# Altium PCB PCB_V1.PcbDoc
Units mil, origin at the board's own origin, x right, y up, seen from the top; angles counter-clockwise.
Board outline 4094.49 x 4094.49 mil, 2 copper layers (Top Layer, Bottom Layer); 16 components, 33 nets, 100 pads, 2 vias.
Unrouted connection lines stored in the file: 1.
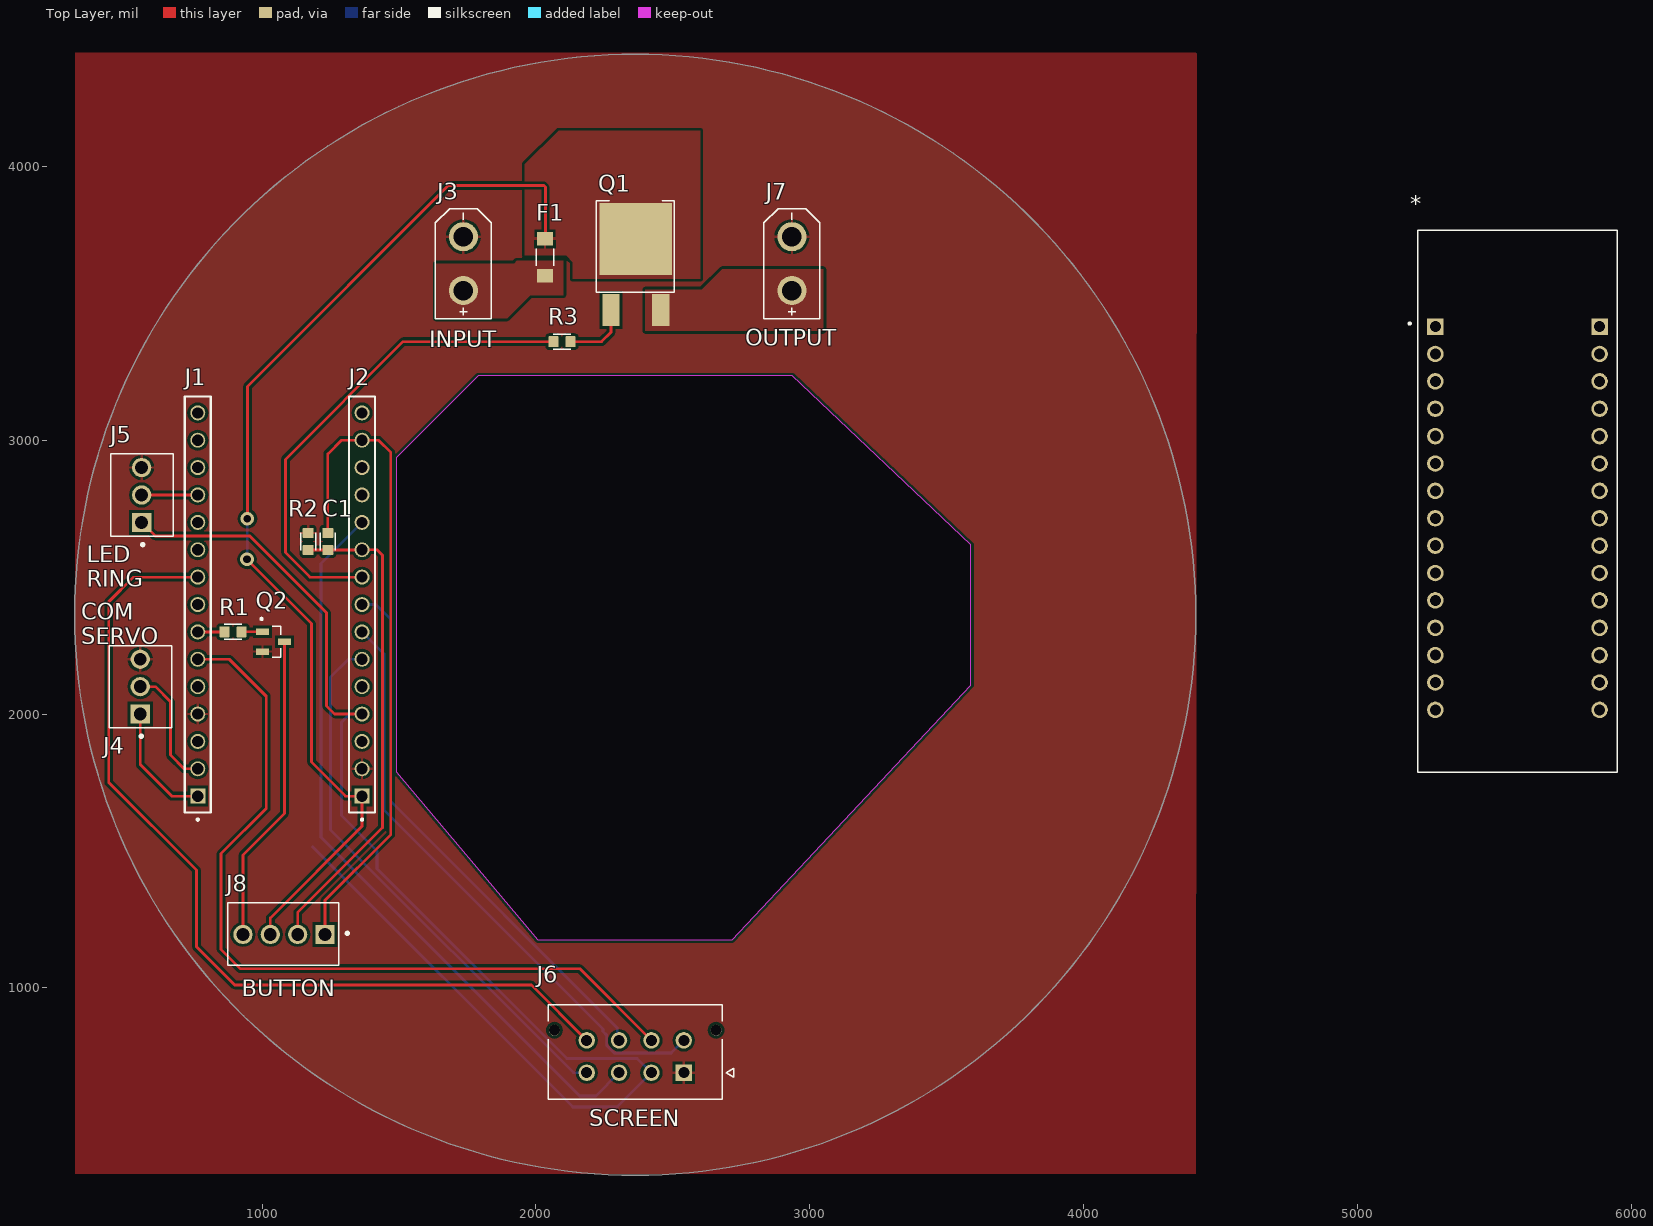
[diagram p0: Top Layer view]
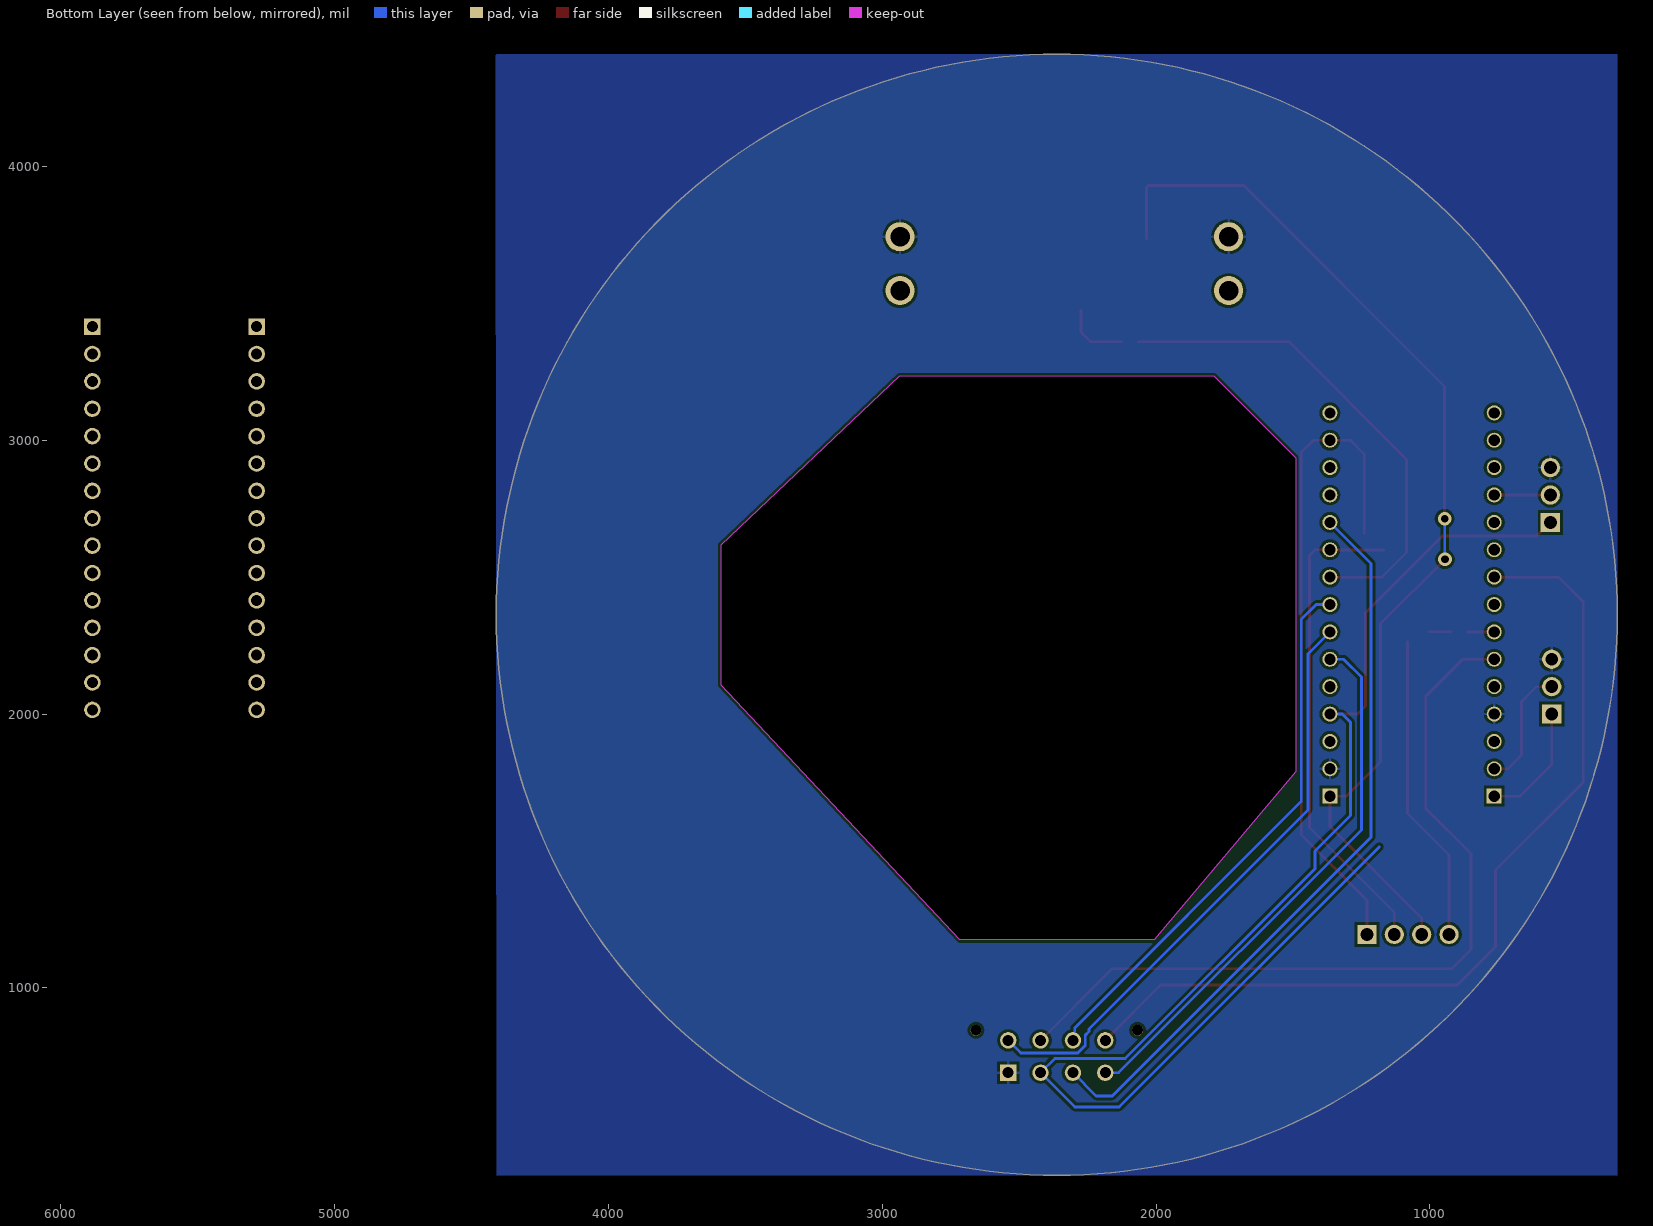
[diagram p1: Bottom Layer view, seen from below]
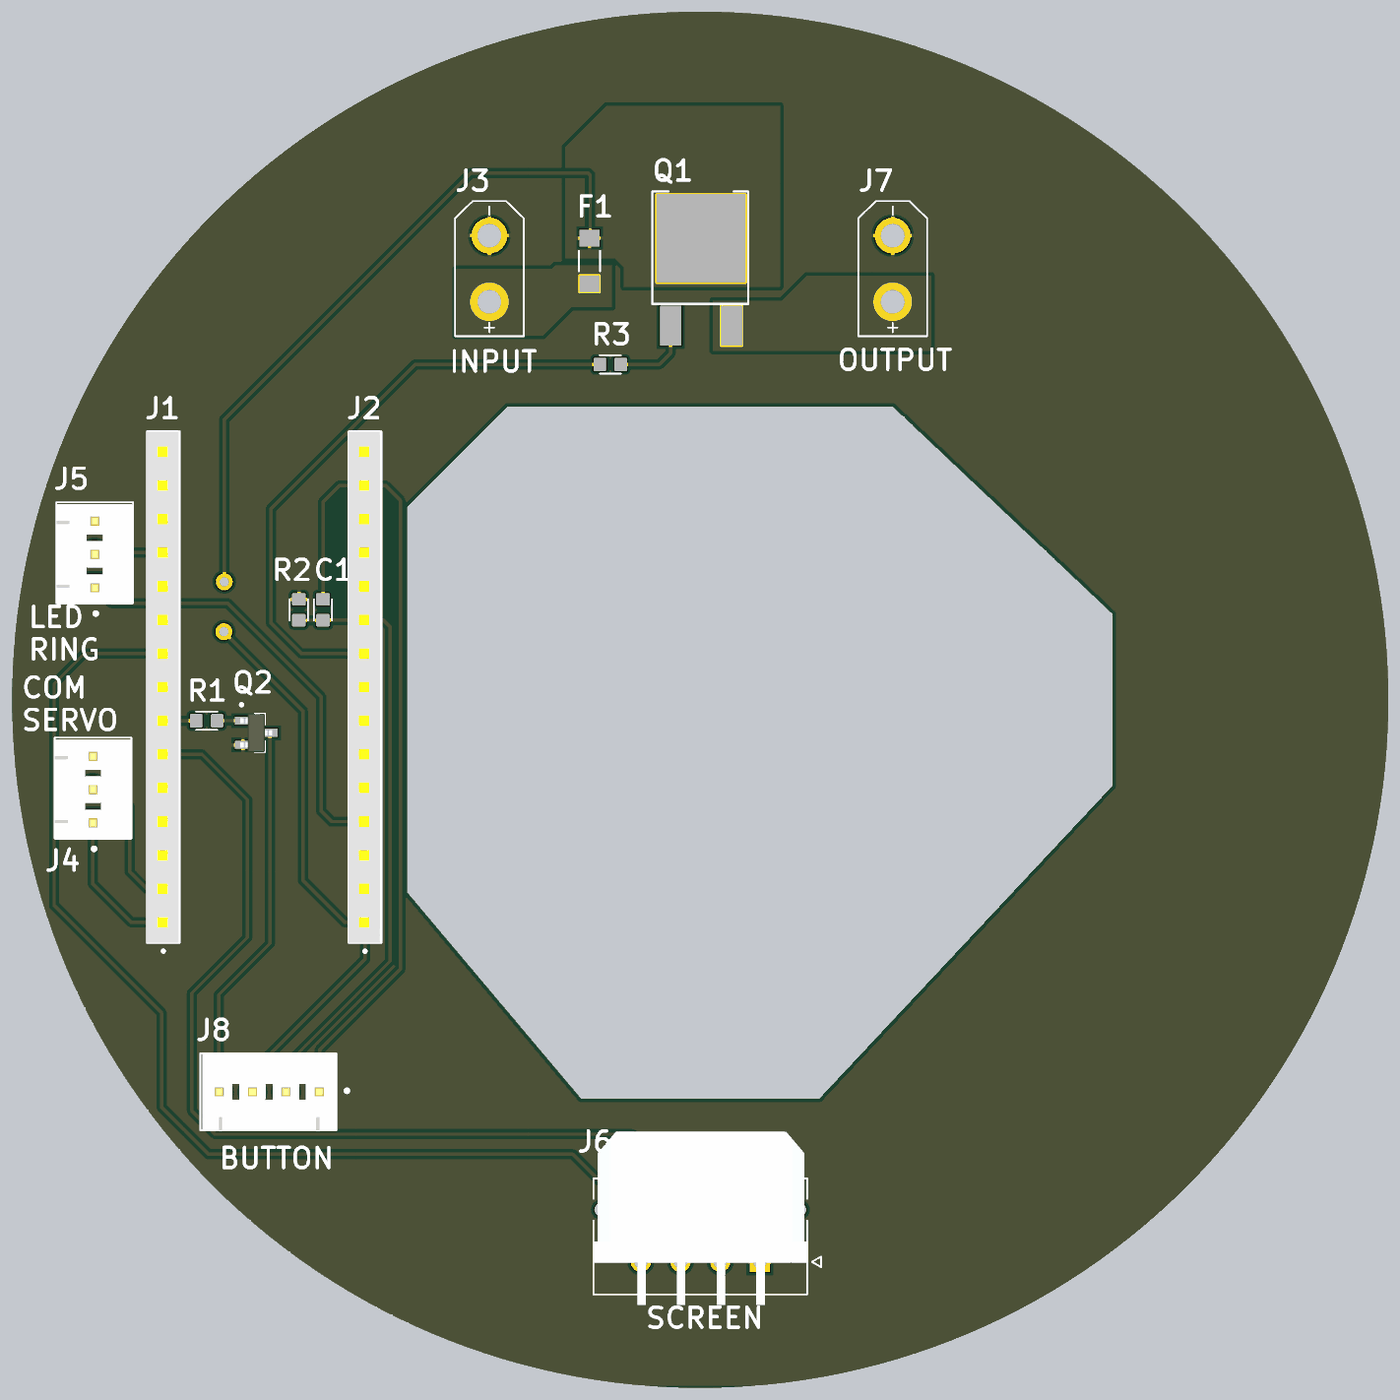
[diagram p2: 3D render of the assembled board from above, using the file's embedded part models]

## Layer stack, top to bottom
Top Solder: solder mask 0.4, Solder Resist, Dk 3.5
Top Layer: signal copper 1.4
Dielectric 1: dielectric 12.6, FR-4, Dk 4.8
Bottom Layer: signal copper 1.4
Bottom Solder: solder mask 0.4, Solder Resist, Dk 3.5

## Board outline
2362.45,315.21 cw(c2362.45,2362.45) 315.21,2362.45 cw(c2362.45,2362.45) 2362.45,4409.7 cw(c2362.45,2362.45) 4409.7,2362.45 cw(c2362.45,2362.45)
cut-out: 1490.14,1789.06 2007.59,1175.18 2716.79,1175.18 3589.1,2106.02 3589.1,2618.36 2935.77,3234.69 1789.06,3234.77 1490.22,2936.04

## Design rules (kind name [scope] priority, off if disabled: settings)
Clearance [All] p1: gap=10 ignorepadtopadclearanceinfootprint=FALSE except(0: Arc-Hole Track-Hole SMDPad-Hole THPad-Hole Via-Hole Fill-Hole Poly-Hole Region-Hole Text-Hole)
PolygonConnect [All] p1: connectstyle=Relief reliefconductorwidth=10 reliefentries=4 polygonreliefangle="90 Angle" airgapwidth=10
RoutingVias [All] p1: holewidth=28 width=50 viastyle="Through Hole" minholewidth=28 minwidth=50 maxholewidth=28 maxwidth=50
SolderMaskExpansion [All] p1: expansion=4 istentingtop=FALSE
Width [All] p1: maxlimit=10 minlimit=10 preferedwidth=10
30 further rules are at their usual default settings.

## Components (designator, comment, footprint, x,y, rotation, side; value= is the part's Value field where it differs from the comment)
* "NUCLEO_L432KC" NUCLEO_L432KC 5585,2776.61 r0 top
C1 "C_0603" C_0603 1240,2630 r90 top
F1 "SF-1206HHA1500R-2" SF-1206HHA1500R-2 2033,3668.05 r270 top
J1 "SSW-115-02-T-S" SSW-115-02-T-S 765,1700 r90 top
J2 "SSW-115-02-T-S" SSW-115-02-T-S 1365,1700 r90 top
J3 "XT30UPB_M" XT30UPB-M 1735,3645 r90 top
J4 "22-27-2031" 22-27-2031 555,2100 r90 top
J5 "22-27-2031" 22-27-2031 560,2800 r90 top
J6 "430450812" 430450812 2540,690 r0 top
J7 "XT30UPB_M" XT30UPB-M 2935,3645 r90 top
J8 "22-27-2041" 22-27-2041 1080,1195 r180 top
Q1 "STD65N55F3" STD65N55F3 2365,3570 r0 top
Q2 "BC817-25LT1G" SOT_BC817 1041.63,2264.24 r270 top
R1 "1k" R_0603 893.77,2300 r0 top
R2 "10k" R_0603 1168.18,2630 r270 top
R3 "1k" R_0603 2095,3360 r0 top

## Footprints (in the part's own frame and the unit in brackets; to place one, negate y for a bottom-side part, rotate by r counter-clockwise, add the part's x,y. Pads: shape width x height; smd on the part's side, far side on the other; paste and mask are expansions set on the pad)
22-27-2031 [mm]
  rect 1.785x1.785 / inner round 1.785 / far side rect 1.785x1.785 hole 1.19: 1(-2.54,0)
  round 1.785 hole 1.19: 2(0,0) 3(2.54,0)
  silkscreen extent -4.7,-2.92 3.81,2.88, body extent -3.92,-2.92 3.66,2.88, height 11.7
22-27-2041 [mm]
  rect 1.785x1.785 / inner round 1.785 / far side rect 1.785x1.785 hole 1.19: 1(-3.81,0)
  round 1.785 hole 1.19: 2(-1.27,0) 3(1.27,0) 4(3.81,0)
  silkscreen extent -5.97,-2.92 5.21,2.88, body extent -5.05,-2.92 5.05,2.88, height 11.7
430450812 [mm]
  rect 1.52x1.52 / inner round 1.52 / far side rect 1.52x1.52 hole 1.02 mask+0.076: 1(0,0)
  round 1.52 hole 1.02 mask+0.076: 2(-3,0) 3(-6,0) 4(-9,0) 5(0,3) 6(-3,3) 7(-6,3) 8(-9,3)
  round 1.02 hole 1.02 unplated mask+0.076: ""(-12,3.94) ""(3,3.94)
  silkscreen extent -12.57,-2.47 4.63,6.3, body extent -12.52,-2.54 3.63,6.23, height 9.91
C_0603 [mm]
  rrect20% 0.94x1.02 smd: 1(-0.79,0) 2(0.79,0)
  silkscreen extent -0.8,-0.69 0.8,0.69
NUCLEO_L432KC [mm]
  rect 1.53x1.53 hole 1.02: CN3_1(-7.62,16.215) CN4_1(7.62,16.215)
  round 1.53 hole 1.02: CN3_2(-7.62,13.675) CN3_3(-7.62,11.135) CN3_4(-7.62,8.595) CN3_5(-7.62,6.055) CN3_6(-7.62,3.515) CN3_7(-7.62,0.975) CN3_8(-7.62,-1.565) CN3_9(-7.62,-4.105) CN3_10(-7.62,-6.645) CN3_11(-7.62,-9.185) CN3_12(-7.62,-11.725) CN3_13(-7.62,-14.265) CN3_14(-7.62,-16.805) CN3_15(-7.62,-19.345) CN4_2(7.62,13.675) CN4_3(7.62,11.135) CN4_4(7.62,8.595) CN4_5(7.62,6.055) CN4_6(7.62,3.515) CN4_7(7.62,0.975) CN4_8(7.62,-1.565) CN4_9(7.62,-4.105) CN4_10(7.62,-6.645) CN4_11(7.62,-9.185) CN4_12(7.62,-11.725) CN4_13(7.62,-14.265) CN4_14(7.62,-16.805) CN4_15(7.62,-19.345)
  silkscreen extent -10.1,-25.14 9.27,25.14, body extent -9.15,-25.69 9.4,26.31, height 8.5
R_0603 [mm]
  rrect20% 0.94x1.02 smd: 1(-0.79,0) 2(0.79,0)
  silkscreen extent -0.8,-0.69 0.8,0.69
SF-1206HHA1500R-2 [mm]
  rect 1.25x1.5 smd: 1(-1.725,0) 2(1.725,0)
  silkscreen extent -0.78,-0.8 0.78,0.8
SOT_BC817 [mm]
  rect 0.61x1.18 smd: 1(-0.915,-1.025) 2(0.915,-1.025) 3(0,1.025)
  silkscreen extent -2.21,-1.21 1.45,0.65, body extent -1.45,-1.2 1.45,1.2, height 1.15
SSW-115-02-T-S [mm]
  rect 1.39x1.39 / inner round 1.39 / far side rect 1.39x1.39 hole 1.04: 01(0,0)
  round 1.39 hole 1.04: 02(2.54,0) 03(5.08,0) 04(7.62,0) 05(10.16,0) 06(12.7,0) 07(15.24,0) 08(17.78,0) 09(20.32,0) 10(22.86,0) 11(25.4,0) 12(27.94,0) 13(30.48,0) 14(33.02,0) 15(35.56,0)
  silkscreen extent -2.27,-1.21 37.09,1.21, body extent -1.52,-1.14 37.08,1.27, height 8.51
STD65N55F3 [mm]
  rect 1.6x3 smd: 1(-2.3,-2.4) 3(2.3,-2.4)
  rect 6.7x6.7 smd: 2(0,4.191)
  silkscreen extent -3.68,-0.76 3.56,7.75
XT30UPB-M [mm]
  round 2.7 hole 1.8: 1(-2.5,0) 2(2.5,0)
  silkscreen extent -5.1,-2.6 5.1,2.6

## Part data
C1: "SMD capacitor 0603"
Q2: "Transistor NPN 45V 0.5A hfe160 SOT23", Package="SOT-23-3 ON Semiconductor", Check_prices=https://www.snapeda.com/parts/BC817-25LT1G/Onsemi/view-part/?ref=eda, MF="ON Semiconductor", MP=BC817-25LT1G, SnapEDA_Link=https://www.snapeda.com/parts/BC817-25LT1G/Onsemi/view-part/?ref=snap
R1 R2 R3: library part R_0603, "Res 0603"

## Via types
v1: diameter 50, hole 28, Top Layer to Bottom Layer, 2 vias

## Nets (pads, with @x,y where several pads share a name; then routed paths per layer and width w, separated by ;. In a path a pad name is that pad's centre, name@x,y a point inside that pad or via, vN(x,y) a via of type N, cw(c..) or ccw(c..) an arc to the next point about the centre after c; other vN are vias at no path point)
3V3: C1.2 J2.14 J8.1 | length 2417.7
  Top Layer w10: J8.1 1230,1320 1470,1560 1470,2955 1425,3000 J2.14 1290,3000 1240,2950 C1.2
+5: J2.04 J5.1 J6.2 | length 4963
  Top Layer w10: J5.1 610,2650 955,2650 1235,2370 1235,2030 1265,2000 J2.04
  Bottom Layer w10: 1185,1515 2135,565 2296.89,565 J6.2 2369.82,742.07 2112.93,742.07 1420,1435 1420,1500 1290,1630 1290,1970 1320,2000 J2.04
+12: F1.1 J2.01 J8.3 Q1.2 | length 3933.8
  Top Layer w10: v1(945,2565) 1180,2330 1180,1825 1305,1700 J2.01 1365,1590 1030,1255 J8.3 ; v1(946.24,2713.26) 946.24,3196.24 1680,3930 2029.14,3930 2035,3924.14 2035,3737.97 F1.1
  Bottom Layer w10: v1(945,2565) 945.62,2565.62 945.62,2712.64 v1(946.24,2713.26)
AREF: J2.13
GND: J1.04 J2.02 J3.2 J4.3 J5.3 J6.1 J7.2 Q2.2 R2.1
NetF1_2: F1.2 J3.1
NetJ7_1: J7.1 Q1.3
NetJ8_4: J8.4 Q2.3 | length 1132.2
  Top Layer w10: J8.4 930,1485 1081.99,1636.99 Q2.3
NetQ1_1: Q1.1 R3.2 | length 243.7
  Top Layer w10: R3.2 2240,3360 2274.45,3394.45 Q1.1
NetQ2_1: Q2.1 R1.2 | length 76.5
  Top Layer w10: R1.2 925.14,2300.26 Q2.1
NRST: J1.03 J2.03
PA0: J2.12
PA1/SPI_CLK: J2.11 J6.3 | length 2727.6
  Bottom Layer w10: J2.11 1215,2550 1215,1550 2160,605 2218.78,605 J6.3
PA2: J2.05
PA3/BTN: C1.1 J2.10 J8.2 R2.2 | length 1794
  Top Layer w10: J8.2 1130,1275 1440,1585 1440,2580 1420,2600 J2.10 1364.45,2599.45 1240.55,2599.45 C1.1 R2.2
PA4/MOS_ALIM: J2.09 R3.1 | length 1814.3
  Top Layer w10: J2.09 1175,2500 1085,2590 1085,2930 1515,3360 R3.1
PA5/CS: J2.08 J6.7 | length 2010
  Bottom Layer w10: J2.08 1415,2400 1470,2345 1470,1680 2296.97,853.03 2296.97,814.92 J6.7
PA6/RST: J2.07 J6.5 | length 2192.3
  Bottom Layer w10: J2.07 1445,2220 1445,1650 2245,850 2245,840.59 2258.86,826.73 2258.86,789.5 2286.29,762.07 2493.96,762.07 J6.5
PA7/SPI_MOSI: J2.06 J6.4 | length 2003.2
  Bottom Layer w10: J2.06 1315,2200 1250,2135 1250,1576.72 2136.72,690 J6.4
PA8/TIM1_CH1: J1.12 J5.2 | length 205
  Top Layer w10: J5.2 J1.12
PA9/UART_TX: J1.01 J4.1 | length 442.6
  Top Layer w10: J4.1 555,1815 670,1700 J1.01
PA10/UART_RX: J1.02 J4.2 | length 448.5
  Top Layer w10: J4.2 610,2100 665,2045 665,1850 715,1800 J1.02
PA11: J1.13
PA12: J1.05
PB0/DC: J1.06 J6.6 | length 3008.6
  Top Layer w10: J1.06 880,2200 1015,2065 1015,1655 850,1490 850,1140 920,1070 2160,1070 J6.6
PB1/BLK: J1.09 J6.8 | length 3322.1
  Top Layer w10: J1.09 530,2500 440,2410 440,1750 760,1430 760,1150 900,1010 1983.78,1010 J6.8
PB3: J2.15
PB4: J1.15
PB5: J1.14
PB6: J1.08
PB7/BTN_LED: J1.07 R1.1 | length 97.7
  Top Layer w10: J1.07 R1.1
PC14: J1.10
PC15: J1.11
pads on no net: *.CN3_1 *.CN3_2 *.CN3_3 *.CN3_4 *.CN3_5 *.CN3_6 *.CN3_7 *.CN3_8 *.CN3_9 *.CN3_10 *.CN3_11 *.CN3_12 *.CN3_13 *.CN3_14 *.CN3_15 *.CN4_1 *.CN4_2 *.CN4_3 *.CN4_4 *.CN4_5 *.CN4_6 *.CN4_7 *.CN4_8 *.CN4_9 *.CN4_10 *.CN4_11 *.CN4_12 *.CN4_13 *.CN4_14 *.CN4_15 J6.

## Polygon pours and split planes (outlines as drawn)
GND on Top Layer "GND_L01_P006" (solid, remove dead copper, pour order 6): 4413.56,4415.72 316.99,4415.72 316.99,321.23 4409.41,321.23
NetJ7_1 on Top Layer "NETJ7_1_L01_P002" (solid, pour order 2): 2400,3400 2400,3550 2605,3550 2680,3625 3050,3625 3050,3400
+12 on Top Layer "+12_L01_P001" (solid, remove dead copper, pour order 1): 1960,3675 2110,3675 2135,3650 2135,3590 2600,3590 2600,4130 2082.76,4130 1960,4007.24
NetF1_2 on Top Layer "NETF1_2_L01_P000" (solid, pour order 0): 1635,3645 1635,3445 1895,3445 1980,3530 2100,3530 2100,3655 1930,3655 1920,3645
GND on Bottom Layer "GND_L02_P005" (solid, remove dead copper, pour order 5): 4411.77,4409.7 315.21,4409.7 315.21,315.21 4407.62,315.21

## Silkscreen, mask and mechanical layers (free items; w line width, h text height)
Top Overlay:
  text "OUTPUT" at 2765,3345 h60
  text "INPUT" at 1610,3340 h60
  text "LED / RING" at 360,2465 h60
  text "COM / SERVO" at 340,2255 h60
  text "BUTTON" at 925,970 h60
  text "SCREEN" at 2195,495 h60
Mechanical 1:
  circle w0.5: c2362.45,2362.45 r2047.24
  lines w0.5: 2008.12,1214.82 2716.79,1766 ; 2008.12,1766 2716.79,1214.82 ; 2362.45,1175.45 2362.45,1490.41 ; 2362.45,1175.45 2716.79,1175.45 2716.79,1490.41 2362.45,1490.41 ; 2362.45,1175.45 2362.45,1490.41 ; 2362.45,1175.45 2008.12,1175.45 2008.12,1490.41 2362.45,1490.41 ; 2880.17,2106.55 3588.83,2618.36 ; 2880.17,2106.55 3588.83,2106.55 ; 2880.17,2106.55 2880.17,2618.36 ; 2880.17,2618.36 3588.83,2106.55 ; 2880.17,2618.36 3588.83,2618.36 ; 3588.83,2106.55 3588.83,2618.36 ; 1490.41,1789.06 1789.06,1490.41 2935.85,1490.41 3234.5,1789.06 3234.5,2935.85 2935.85,3234.5 1789.06,3234.5 1490.41,2935.85 1490.41,1789.06